# EAGLE board Binaari_shield (EAGLE 7.7.0)
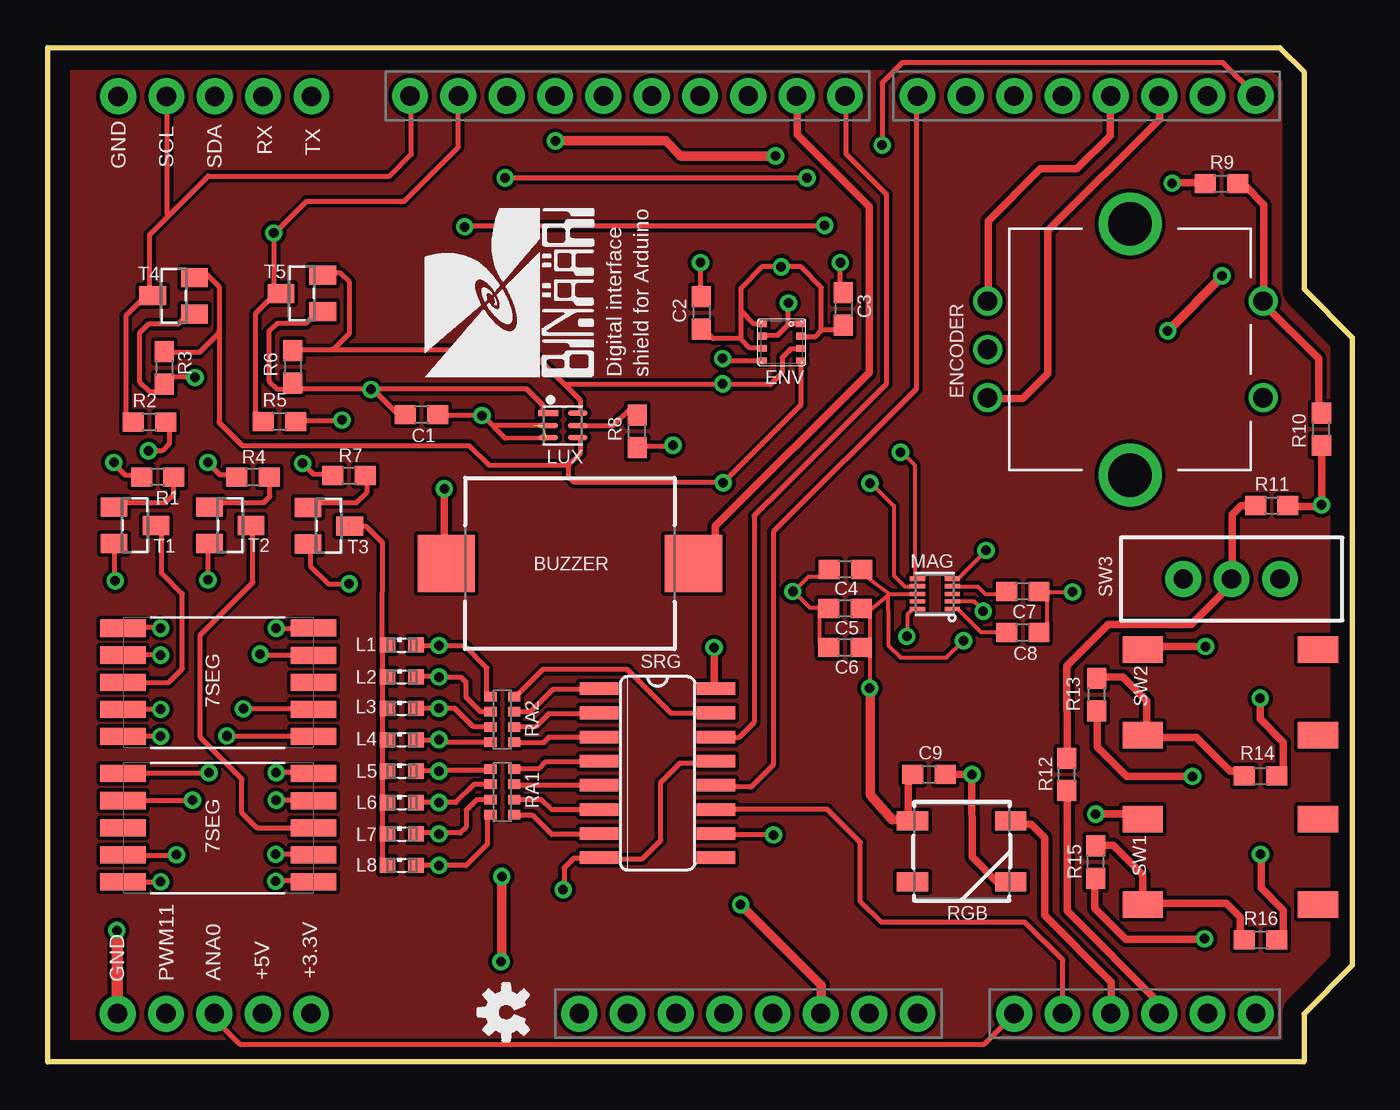
[diagram p0: board, top side]
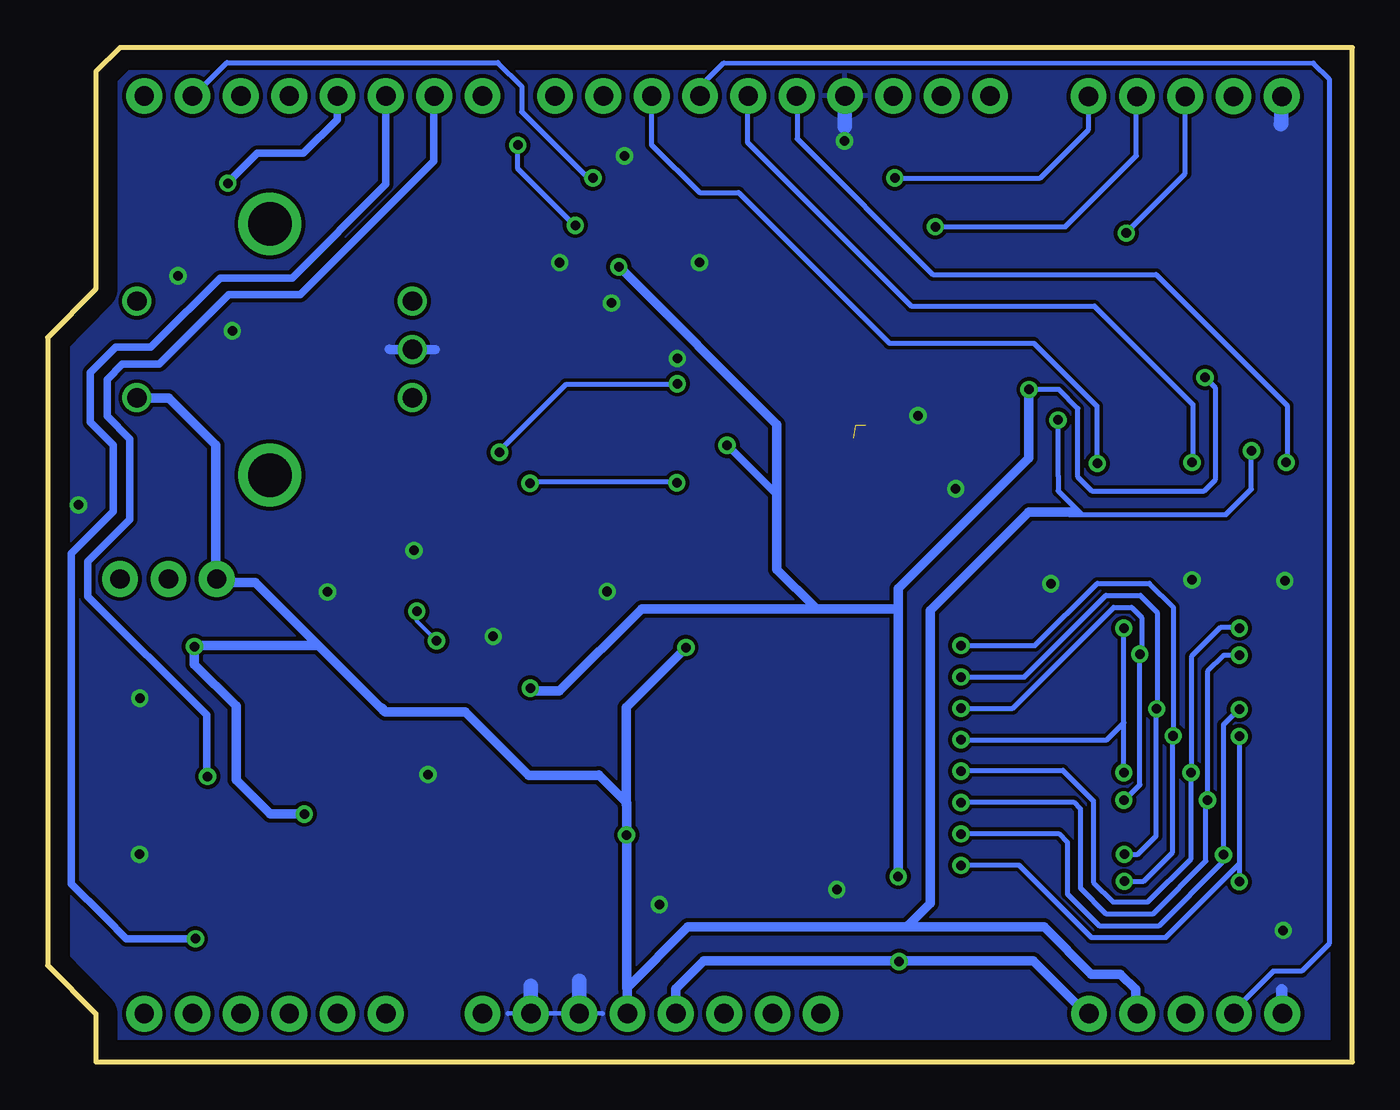
[diagram p1: board, bottom side, seen from below]

Size 68.58 x 53.34 mm. Coordinates in mm from the lower left corner, seen from the top.
Outline: 0,0 0,53.34 64.77,53.34 66.04,52.07 66.04,40.64 68.58,38.1 68.58,5.08 66.04,2.54 66.04,0 0,0
Copper layers (1*16): Top 0.035mm / dielectric 1.5mm / Bottom 0.035mm
Design rules "default *": minimum track width 10mil, minimum drill 24mil, track to track 8mil, track to pad 6mil, pad to pad 8mil, via to via 8mil, smd to smd 8mil, copper to edge 40mil, drill to drill 8mil, minimum pad ring 10mil, minimum via ring 8mil, stop-mask expansion 4mil, vias tented up to drill 0mil, thermal gap 10mil

## Footprints (pad centres in the part's own frame; a part is rotated, then mirrored left to right if it is on the bottom)
0603 = smd 1.1 x 1: 1 -0.85,0; 2 0.85,0
UNO_R3_SHIELD = drill 1.016 pad 1.88: 3.3V 35.56,2.54; 5V 38.1,2.54; A0 50.8,2.54; A1 53.34,2.54; A2 55.88,2.54; A3 58.42,2.54; A4 60.96,2.54; A5 63.5,2.54; AREF 24.13,50.8; D2 58.42,50.8; D3 55.88,50.8; D4 53.34,50.8; D5 50.8,50.8; D6 48.26,50.8; D7 45.72,50.8; D8 41.91,50.8; D9 39.37,50.8; D10 36.83,50.8; D11 34.29,50.8; D12 31.75,50.8; D13 29.21,50.8; GND@0 40.64,2.54; GND@1 43.18,2.54; GND@2 26.67,50.8; IOREF 30.48,2.54; NC 27.94,2.54; RES 33.02,2.54; RX 63.5,50.8; SCL 19.05,50.8; SDA 21.59,50.8; TX 60.96,50.8; VIN 45.72,2.54
SEG = smd 0.9 x 2.4: P$1 0.6,10.01; P$2 2.02,10.01; P$3 3.45,10.01; P$4 4.88,10.01; P$5 6.3,10.01; P$6 0.6,0; P$7 2.03,0; P$8 3.45,0; P$9 4.87,0; P$10 6.31,0
BUZZER-CMT1102 = smd 3 x 3: 1 -6.5,0; 2 6.5,0
ROTARY_ENC_PLAIN = drill 1.016: A 7.493,-2.54; B 7.493,2.54; C 7.493,0; SW+ -6.985,2.54; SW- -6.985,-2.54 | drill 2.286: P$3 0,6.604; P$4 0,-6.604
BME280 = smd 0.35 x 0.5: 1 0.975,-1.025; 2 0.325,-1.025; 3 -0.325,-1.025; 4 -0.975,-1.025; 5 -0.975,1.025; 6 -0.325,1.025; 7 0.325,1.025; 8 0.975,1.025
SML0603 = smd 0.8 x 0.8: A 0.75,0; C -0.75,0
FN-6 = smd 1.05 x 0.3: 1 -0.775,0.65; 2 -0.775,0; 3 -0.775,-0.65; 4 0.775,-0.65; 5 0.775,0; 6 0.775,0.65
DFN-10 = smd 0.8 x 0.22: 1 -0.91,0.8; 2 -0.91,0.4; 3 -0.91,0; 4 -0.91,-0.4; 5 -0.91,-0.8; 6 0.91,-0.8; 7 0.91,-0.4; 8 0.91,0; 9 0.91,0.4; 10 0.91,0.8
0603-ARV = smd 0.5 x 0.65: 1 -1.2,-0.625; 2 -0.4,-0.625; 3 0.4,-0.625; 4 1.2,-0.625; 5 1.2,0.625; 6 0.4,0.625; 7 -0.4,0.625; 8 -1.2,0.625
WS2812B = smd 1.651 x 1: 1 -2.577,1.6; 2 -2.577,-1.6; 3 2.577,-1.6; 4 2.577,1.6
SO16 = smd 0.66 x 2.032: 1 -4.445,-3.073; 2 -3.175,-3.073; 3 -1.905,-3.073; 4 -0.635,-3.073; 5 0.635,-3.073; 6 1.905,-3.073; 7 3.175,-3.073; 8 4.445,-3.073; 9 4.445,3.073; 10 3.175,3.073; 11 1.905,3.073; 12 0.635,3.073; 13 -0.635,3.073; 14 -1.905,3.073; 15 -3.175,3.073; 16 -4.445,3.073
SW = smd 1.397 x 2.108: P$1 5.2,10.25; P$2 0.7,10.25; P$3 0.7,1.05; P$4 5.2,1.05
SWITCH-SPDT = drill 1.016 pad 1.88: 1 0,2.54; 2 0,0; 3 0,-2.54
SOT23 = smd 1 x 1.4: 1 -0.95,-1.1; 2 0.95,-1.1; 3 0,1.1
1X05 = drill 1.016 pad 1.88: 1 0,0; 2 2.54,0; 3 5.08,0; 4 7.62,0; 5 10.16,0

## Placement (x,y rotation side)
C1  [0603]  19.66,34.04 180 top
C2  [0603]  34.37,39.4 270 top
C3  [0603]  41.83,39.6 270 top
C4  [0603]  41.94,25.91 180 top
C5  [0603]  41.91,23.85 180 top
C6  [0603]  41.91,21.79 180 top
C7  [0603]  51.26,24.74 180 top
C8  [0603]  51.26,22.58 180 top
C9  [0603]  46.33,15.11 180 top
E$1  [UNO_R3_SHIELD]  0,0 0 top
E$2  [SEG]  13.97,16.51 90 top
E$3  [SEG]  13.97,8.86 90 top
E$4  [OSHW-LOGO-S]  24.1,2.62 90 top
E$6  [BUZZER-CMT1102]  27.45,26.21 0 top
E$8  [LOGO2]  29.68,35.07 90 top
ENCODER  [ROTARY_ENC_PLAIN]  56.9,37.47 180 top
ENV  [BME280]  38.58,37.85 90 top
L1  [SML0603]  18.62,21.92 0 top
L2  [SML0603]  18.62,20.24 0 top
L3  [SML0603]  18.62,18.59 0 top
L4  [SML0603]  18.62,16.94 0 top
L5  [SML0603]  18.62,15.29 0 top
L6  [SML0603]  18.62,13.64 0 top
L7  [SML0603]  18.62,11.99 0 top
L8  [SML0603]  18.62,10.34 0 top
LUX  [FN-6]  27.09,33.47 0 top
MAG  [DFN-10]  46.63,24.61 180 top
R1  [0603]  5.79,30.76 180 top
R2  [0603]  5.36,33.66 0 top
R3  [0603]  6.12,36.5 270 top
R4  [0603]  10.79,30.76 0 top
R5  [0603]  12.19,33.68 0 top
R6  [0603]  12.88,36.55 270 top
R7  [0603]  15.85,30.84 0 top
R8  [0603]  30.99,33.16 90 top
R9  [0603]  61.7,46.18 0 top
R10  [0603]  66.95,33.27 90 top
R11  [0603]  64.34,29.26 0 top
R12  [0603]  53.57,15.12 90 top
R13  [0603]  55.15,19.32 90 top
R14  [0603]  63.75,15.04 0 top
R15  [0603]  55.1,10.52 90 top
R16  [0603]  63.75,6.43 0 top
RA1  [0603-ARV]  23.9,14.2 90 top
RA2  [0603-ARV]  23.9,18.01 90 top
RGB  [WS2812B]  48.04,11.08 0 top
SRG  [SO16]  32.06,15.18 270 top
SW1  SW1  [SW]  67.82,7.57 90 top
SW2  SW2  [SW]  67.82,16.48 90 top
SW3  [SWITCH-SPDT]  62.23,25.4 90 top
T1  [SOT23]  4.6,28.22 270 top
T2  [SOT23]  9.6,28.22 270 top
T3  [SOT23]  14.78,28.19 270 top
T4  [SOT23]  6.63,40.28 90 top
T5  [SOT23]  13.36,40.41 90 top
USER_CONN1  [1X05]  3.68,2.54 0 top
USER_CONN2  [1X05]  13.87,50.77 180 top

## Library data of the parts
C1-C9 R8-R12 RA1 RA2 = SparkFun-Capacitors
E$1 = SparkFun-Boards
E$2 E$3 E$8 SW1 SW2 = segment_tuukka
E$4 = SparkFun-Aesthetics
E$6 ENCODER SW3 = SparkFun-Electromechanical
ENV = bosch-bme280
L1-L8 = led
LUX MAG = SparkFun-Sensors
R1-R7 R13-R16 = SparkFun-Resistors
RGB = SparkFun-LED
SRG = 74xx-us
T1-T5 = sot23_tuukka
USER_CONN1 USER_CONN2 = SparkFun-Connectors

## Nets
GND: E$1.GND@2
S$80: E$1.A3

## Tracks (layer width: path | path; a pad name or v marks a point on that pad's centre or on a via)
GND  (via drill 0.5)
  Top 0.203: 47.85,25.43 v49.33,26.9
  Top 0.254: 38.94,38.81 v38.94,39.9
  Bottom 0.254: 39.42,2.54 44.37,2.55
  Bottom 0.508: 48.21,37.47 50.6,37.47 50.62,37.49
  Bottom 0.61: 3.72,2.62 3.72,3.79
  Bottom 0.762: 40.64,2.59 40.64,4.27 | 43.18,2.52 43.18,4.01 | 3.73,50.77 3.73,49.33 3.76,49.3 | E$1.GND@2 26.67,49.2 26.7,49.17
  other vias: 27.1,9.07 3.56,25.3 8.43,25.35 15.85,25.15 48.59,15.12 63.75,10.92 63.73,19.13 66.95,29.29 53.87,24.71 45.16,22.38 39.17,24.74 41.66,42.03 34.32,42.04 35.48,36.99 36.43,8.27 22.83,33.99 58.87,38.45 61.73,41.34 20.85,30.14 26.69,48.43 38.26,47.64 3.64,6.92
  pour Bottom: 1.09,52.6 64.41,52.6 65.25,51.77 65.25,40.23 67.79,37.69 67.79,5.54 65.2,2.95 65.2,0.71 1.09,0.71
S$1  (via drill 0.5)
  Top 0.254: 12.88,15.21 v12.01,15.21
S$2  (via drill 0.5)
  other vias: 12.01,13.77
S$3
  Bottom 0.254: 20.55,18.59 17.86,18.59 12.55,23.9 11.61,23.9 11.07,23.37 11.07,21.46
S$4
  Bottom 0.254: 10.31,18.52 10.31,11.89 11.28,10.92 11.96,10.92
S$5  (via drill 0.5)
  Bottom 0.254: 9.45,17.12 9.45,11.02 10.97,9.5 v11.99,9.5
S$6
  Top 0.254: 12.9,13.77 12.04,13.77
S$7  (via drill 0.5)
  other vias: 5.94,18.54
S$8
  Top 0.254: 12.95,9.53 12.01,9.53
S$9
  Bottom 0.254: 20.55,20.24 17.25,20.24 12.95,24.54 11.15,24.54 10.26,23.65 10.26,18.57
S$10
  Bottom 0.254: 11.18,21.39 11.18,14.58 11.96,13.79
S$11  (via drill 0.5)
  other vias: 20.57,10.34
S$12
  Bottom 0.254: 5.94,18.57 6.78,17.73 6.78,10.92
S$13  (via drill 0.5)
  other vias: 11.18,21.44
S$14  (via drill 0.5)
  other vias: 6.78,10.9
S$15  (via drill 0.5)
  other vias: 10.29,18.57
S$16
  Top 0.406: 58.42,16.94 58.45,16.97
S$17
  Top 0.254: 12.04,22.8 13.28,22.8
S$18
  Top 0.254: 11.2,21.41 13.06,21.41 13.06,21.39
S$19
  Top 0.254: 13.18,19.96 13.18,19.86
S$20
  Top 0.254: 10.31,18.59 13.23,18.59
S$21
  Top 0.254: 9.47,17.14 13.46,17.14 13.46,17.12
S$22  (via drill 0.5)
  other vias: 5.94,22.81
S$23  (via drill 0.5)
  Top 0.254: 12.98,10.92 v11.99,10.92
S$24
  Bottom 0.254: 8.46,15.21 8.46,21.31 6.93,22.84 5.94,22.84
S$25  (via drill 0.5)
  Bottom 0.254: 7.62,13.74 v7.62,13.77 7.62,20.52 6.76,21.39 v5.94,21.39
S$26  (via drill 0.5)
  other vias: 8.48,15.21
S$27  (via drill 0.5)
  other vias: 20.57,11.99
S$28  (via drill 0.5)
  other vias: 20.57,13.64
S$29  (via drill 0.5)
  other vias: 20.57,15.29
S$30  (via drill 0.5)
  Bottom 0.254: 12.01,15.24 12.01,17.83 | 12.01,17.83 v12.01,22.81 | v20.57,16.94 12.9,16.94 12.01,17.83
S$31  (via drill 0.5)
  other vias: 20.57,18.59
S$32  (via drill 0.5)
  other vias: 20.57,20.24
S$33  (via drill 0.5)
  Bottom 0.254: v20.57,21.89 16.69,21.89 13.41,25.17 10.67,25.17 9.42,23.93 v9.42,17.14
S$34
  Top 0.254: 23.09,19.3 23.09,20.73 21.95,21.87 20.65,21.87 20.62,21.89
S$35
  Top 0.254: 23.11,18.41 22.76,18.41 22,19.18 22,19.96 21.74,20.22 20.62,20.22 20.6,20.24
S$36
  Top 0.254: 23.04,17.63 22.38,17.63 21.41,18.59 20.62,18.59
S$37
  Top 0.254: 23.22,16.82 20.78,16.82 20.68,16.92
S$38
  Top 0.254: 23.14,15.34 20.6,15.34
S$39
  Top 0.254: 23.11,13.01 23.11,11.46 22,10.34 20.6,10.34
S$40
  Top 0.254: 23.14,13.79 22.55,13.79 22,13.23 22,12.34 21.69,12.04 20.6,12.04
S$41
  Top 0.254: 23.09,14.61 22.43,14.61 21.46,13.64 20.6,13.64
S$42
  Top 0.254: 20.6,21.87 19.43,21.87
S$43
  Top 0.254: 20.55,20.27 19.36,20.27
S$44
  Top 0.254: 20.55,18.59 19.46,18.59 19.41,18.64
S$45
  Top 0.254: 20.57,16.92 19.51,16.92 19.48,16.89
S$46
  Top 0.254: 20.57,15.32 19.46,15.32 19.41,15.27
S$47
  Top 0.254: 20.55,13.64 19.48,13.64 19.43,13.59
S$48
  Top 0.254: 20.55,12.04 19.46,12.04 19.43,12.06
S$49
  Top 0.254: 20.55,10.34 19.46,10.34 19.43,10.36
S$50
  Top 0.254: 17.6,21.92 17.59,10.24
S$51
  Top 0.254: 5.94,9.45 4.88,9.45 4.8,9.53
S$52
  Top 0.254: 6.78,10.85 4.5,10.85 4.45,10.79
S$53
  Top 0.254: 7.62,13.72 4.29,13.72 4.27,13.74
S$54
  Top 0.254: 8.48,15.16 4.78,15.16 4.72,15.11
S$55
  Top 0.254: 5.94,22.84 4.45,22.84 4.42,22.86
S$56
  Top 0.254: 5.94,21.41 4.67,21.41
S$57
  Top 0.254: 5.92,18.54 4.88,18.54 4.78,18.64
S$58
  Bottom 0.254: 20.57,15.34 15.21,15.34 13.61,13.74 13.61,9.45 12.57,8.41 10.77,8.41 8.48,10.69 8.48,15.14 8.53,15.19
S$59
  Bottom 0.254: 20.57,13.66 14.66,13.66 14.3,13.31 14.3,9.14 12.95,7.8 10.46,7.8 7.7,10.57 7.7,13.66 7.57,13.79
S$60
  Bottom 0.254: 20.57,12.01 15.44,12.01 14.99,11.56 14.99,8.84 13.31,7.16 10.16,7.16 6.88,10.44 6.88,10.69 6.78,10.79
S$61  (via drill 0.5)
  Top 0.254: v5.94,17.12 4.83,17.12 4.8,17.14
  Bottom 0.254: 20.57,10.36 17.53,10.36 13.72,6.55 9.8,6.55 5.94,10.41 | v5.94,17.12 5.94,10.41 | 5.94,10.41 v5.94,9.47 5.94,9.45
S$62
  Top 0.254: 28.19,11.96 26.49,11.96 25.5,12.95 24.61,12.95 24.54,12.88
S$63
  Top 0.254: 28.27,13.26 26.49,13.26 25.96,13.79 24.77,13.79 24.71,13.74
S$64
  Top 0.254: 28.19,14.55 24.59,14.55 24.54,14.61
S$65
  Top 0.254: 28.19,15.77 26.16,15.77 25.81,15.42 24.56,15.42 24.54,15.39
S$66
  Top 0.254: 28.17,17.07 26.34,17.07 26.06,16.79 24.66,16.79 24.59,16.71
S$67
  Top 0.254: 28.25,18.31 26.34,18.31 25.65,17.63 24.61,17.63
S$68
  Top 0.254: 28.25,19.58 26.54,19.58 25.38,18.41 24.56,18.41 24.54,18.39
S$69
  Top 0.254: 34.34,18.34 32.77,18.34 30.45,20.65 26.04,20.65 24.64,19.25
S$70
  Top 0.254: 13.44,31.45 13.97,30.91 14.78,30.91
S$71
  Top 0.254: 13.95,29.41 16.23,29.41 16.79,29.97 16.79,30.91
S$72
  Top 0.406: 64.95,6.73 64.95,7.98 63.78,9.14 63.78,11
S$73
  Top 0.406: 64.95,15.09 64.95,16.82 63.73,18.03 63.73,19.13 63.75,19.15
S$74  (via drill 0.5)
  Bottom 0.406: 65.53,7.57 64.44,6.48 v60.81,6.48
S$75
  Top 0.406: 55.23,11.4 56.01,11.38 57.56,9.85
S$76  (via drill 0.5)
  Top 0.406: v60.17,15.01 56.71,15.02 55.17,16.58 55.18,18.05 55.15,18.15
S$77
  Top 0.406: 55.24,20.25 56.52,20.25 57.77,18.99 57.77,17.24 58.42,17.17
S$78  (via drill 0.5)
  other vias: 55.09,13.03
S$79
  Bottom 0.508: 55.09,13.05 56.88,13.05 58.67,14.84 58.67,15.96
S$80
  Top 0.406: E$1.A3 58.45,3.06 53.58,7.95 53.59,13.94
S$81
  Top 0.406: 62.26,25.17 60.1,23.01 55.75,23.01 53.58,20.82 53.59,16
S$82  (via drill 0.5)
  Bottom 0.508: 54.41,21.89 60.81,21.89 v60.86,21.84 60.86,20.9 58.67,18.72 58.67,15.9
S$83
  Top 0.254: 6.4,33.4 6.4,32.51 6.02,32.13 5.33,32.13 5.31,32.16
S$84
  Top 0.406: 65.56,29.18 65.58,29.21 66.98,29.21
S$85
  Top 0.406: 62.26,25.32 62.26,28.78 62.74,29.26 63.14,29.26 63.2,29.31
S$86
  Top 0.406: 60.85,21.85 57.73,21.85 57.73,21.87
S$87
  Top 0.406: 55.85,50.72 55.85,48.72 54.1,46.97 52.17,46.97 49.43,44.22 49.43,40.01 49.45,39.98
S$88
  Top 0.406: 58.45,50.67 58.45,49.58 52.58,43.71 52.58,36.2 51.26,34.87 49.61,34.87
S$89
  Top 0.254: 15.85,38.3 14.99,37.44 13.21,37.44
S$90
  Top 0.254: 7.19,39.12 6.86,38.79 5.28,38.79 4.83,38.33 4.83,35.79 5.36,35.26 5.87,35.26
S$91
  Bottom 0.254: 6.66,28.78 5.31,30.12 5.31,32.16
S$92
  Top 0.203: 45.44,23.77 45.19,23.52 45.19,22.43
S$93  (via drill 0.5)
  other vias: 49.17,23.7
S$94
  Top 0.203: 47.85,23.8 49.05,22.61 50.19,22.61
S$95
  Top 0.203: 47.9,24.99 48.9,24.99 49.28,24.61 50.06,24.61
S$96  (via drill 0.5)
  other vias: 32.87,32.42
S$97
  Top 0.203: 52.45,22.84 52.53,22.91
S$98
  Top 0.254: 8.43,31.5 9.04,30.89 9.78,30.89
S$99
  Top 0.203: 52.48,24.69 52.5,24.71 53.9,24.71
S$100
  Top 0.203: 45.47,24.59 44.27,24.59 43.13,25.43
S$101
  Top 0.203: 44.25,24.59 43.2,23.75 42.88,23.75
S$102
  Top 0.203: 40.62,25.5 39.98,25.5 39.24,24.77
S$103
  Top 0.203: 40.64,23.88 40.08,23.88 39.19,24.77
S$104
  Top 0.254: 3.45,31.5 4.09,30.86 4.85,30.86
S$105
  Top 0.254: 13.16,12.29 11.02,12.29 10.21,13.11 10.21,14.88 8.03,17.07 8.03,22.45 10.79,25.22 10.79,28.27 10.82,28.3
S$106
  Top 0.254: 4.83,19.96 6.38,19.96 7.09,20.68 7.09,24.61 5.99,25.7 5.99,28.09 6.07,28.17
S$107
  Top 0.254: 17.6,22.16 17.61,27.29 16.74,28.17 15.93,28.17
S$108
  Top 0.254: 3.99,29.41 6.2,29.41 6.63,29.84 6.63,30.56
S$109
  Top 0.254: 13.82,27.1 13.82,26.09 14.78,25.12 15.82,25.12 15.85,25.09
S$110
  Top 0.254: 8.91,29.41 11.35,29.41 11.68,29.74 11.68,30.56 11.66,30.58
S$111
  Top 0.254: 32.89,32.37 31.24,32.36
S$112
  Top 0.254: 3.53,25.3 3.53,27.25 3.58,27.3
S$113
  Top 0.254: 8.43,25.32 8.43,27.18
S$114
  Bottom 0.406: 64.62,36.7 62.71,36.7 59.05,40.36 55.3,40.36 48.28,47.37 48.28,50.77
S$115
  Top 0.406: 55.88,2.52 55.9,4.2 52.4,7.7 52.41,11.78 51.69,12.5 51.02,12.51 50.95,12.54
S$116
  Top 0.406: 49.97,9.39 48.59,10.78 48.58,15.09
S$117
  Top 0.406: 60.76,6.45 56.66,6.45 55.04,8.07 55.04,9.4
S$118
  Top 0.406: 47.54,15.11 48.54,15.11
S$119  (via drill 0.5)
  Top 0.254: 39.65,38.15 40.36,38.15 40.66,38.46 40.66,38.48 | 40.66,38.48 40.66,40.74 39.6,41.81 v38.56,41.81 37.54,41.81 36.47,40.74 | 41.68,38.48 40.66,38.48
S$120
  Top 0.254: 39.47,38.81 38.96,38.81 38.35,38.2 37.67,38.2 37.64,38.18
S$121
  Top 0.254: 37.41,37.54 36.91,37.54 36.45,38 36.45,39.5 | 36.45,39.5 36.45,40.13 36.45,40.64 36.45,40.72 | 37.47,38.81 37.13,38.81 36.45,39.5
S$122
  Bottom 0.406: 62.97,37.77 63.14,37.59 65,37.59 66.34,36.25 66.34,33.66 65.13,32.44 65.13,28.96 67.33,26.75 67.33,9.37 65.61,7.64
S$123
  Top 0.254: 36.42,38.02 34.98,38.02 34.59,38.41
S$124
  Bottom 0.254: 60.94,50.77 59.16,52.55 44.91,52.55 43.66,51.31 43.66,49.96 40.82,47.12 40.01,46.31
S$125
  Bottom 0.406: 62.94,37.8 59.51,41.22 55.73,41.22 50.8,46.15 50.8,50.75
S$126
  Top 0.254: 28.22,10.72 27.66,10.72 27.15,10.21 27.15,9.02
S$127
  Bottom 0.406: 64.64,36.7 65.46,35.89 65.46,33.96 64.26,32.77 64.26,28.52 66.47,26.31 66.47,24.49 60.22,18.24 60.22,14.96
S$128
  Top 0.254: 41.66,40.77 41.66,41.97
S$129
  Top 0.254: 34.34,40.56 34.34,42.04
S$130
  Top 0.254: 53.37,2.52 53.37,5.36 51.36,7.35 43.8,7.35 42.72,8.43 42.72,11.56 40.99,13.29 35.81,13.28 35.79,13.26
S$131
  Top 0.6: 3.66,2.54 3.66,6.81
S$132
  Bottom 0.254: 34.45,51.12 33.03,52.54 2.06,52.53 1.22,51.69 1.22,6.22 2.67,4.78 4.17,4.78 6.3,2.64
S$133
  Top 0.254: 50.8,2.56 50.8,2.52 49.2,0.91 10.13,0.91 8.69,2.36
S$134
  Bottom 0.508: 35.56,2.52 35.56,3.83 34.09,5.31 16.76,5.31 13.89,2.44
S$135  (via drill 0.5)
  Bottom 0.508: 38.15,3.89 v38.15,11.94 38.15,13.61 39.62,15.09
S$136
  Bottom 0.508: 39.65,15.06 43.28,15.06 46.63,18.41 50.83,18.41 51.03,18.62
S$137
  Top 0.254: 11.91,40.54 11.91,43.56 13.61,45.26 18.75,45.26 21.59,48.11 21.59,50.72 21.54,50.77
S$138
  Top 0.254: 5.36,40.49 5.36,43.51 8.43,46.58 17.98,46.58 19.13,47.73 19.13,50.75 19.15,50.77
S$139
  Top 0.254: 8.41,41.38 9.04,40.74 9.04,38.38 7.98,37.31 6.4,37.31
S$140
  Top 0.254: 15.88,38.3 15.88,41 15.39,41.48 14.73,41.48
S$141
  Top 0.254: 13.92,39.19 13.56,38.84 12.06,38.84 11.63,38.41 11.63,35.81 12.06,35.38 12.7,35.38
S$142
  Top 0.254: 6.27,35.23 6.29,35.25
S$143
  Bottom 0.508: 23.34,7.1 23.34,7.18 22.18,8.34 22.18,23.75 17.05,28.89
S$144
  Top 0.254: 5.11,40.23 4.12,39.24 4.12,33.6
S$145
  Top 0.254: 11.84,40.26 10.92,39.34 10.92,33.73
S$146
  Top 0.254: 14.94,37.47 25.32,37.47 27.99,34.8 28,34.09
S$147
  Top 0.254: 9.02,38.46 9.02,33.63 10.24,32.41 22.17,32.41 23.21,31.39 27.36,31.38 28.01,32.03 28.01,32.8
S$148
  Top 0.254: 26.06,34.1 26.06,34.52 25.2,35.38
S$149
  Top 0.406: 39.39,50.79 39.39,48.76 43.18,44.97 43.18,36.25 35.1,28.17 35.1,27.34
S$150  (2 unrouted)
  Top 0.254: 26.21,32.79 24.03,32.79 | 26.12,33.47 23.94,33.47 | 25.59,33.47 23.41,33.47
S$151  (via drill 0.5)
  Top 0.254: 63.5,50.83 61.77,52.55 44.93,52.55 43.87,51.49 v43.87,48.21
  Bottom 0.254: 40.87,43.97 43.87,46.97 v43.87,48.21
S$152
  Top 0.254: 20.88,34.01 22.84,34.01 24.04,32.8
S$153
  Top 0.254: 39.52,37.49 39.06,37.49 38.61,37.03 38.61,36.25 37.97,35.61 27.2,35.61 27.18,35.64
S$154  (via drill 0.5)
  other vias: 3.48,31.52
S$155  (via drill 0.5)
  other vias: 8.43,31.52
S$156  (via drill 0.5)
  other vias: 13.41,31.47
S$157
  Top 0.254: 13.39,29.26 13.34,29.21
S$158
  Top 0.254: 8.46,29.44 8.31,29.29
S$159
  Bottom 0.254: 29.18,50.8 29.18,48.54 22.05,41.4 10.31,41.4 3.43,34.52 3.43,31.55 3.48,31.5
S$160
  Bottom 0.254: 31.8,50.77 31.8,48.36 23.19,39.75 13.56,39.75 8.38,34.57 8.38,31.47
S$161
  Bottom 0.254: 36.84,50.83 36.84,48.23 34.31,45.72 32.26,45.72 24.33,37.8 16.74,37.8 13.44,34.49 13.44,31.52
S$162
  Top 0.406: 60.5,46.28 60.6,46.18
S$163
  Top 0.406: 62.94,46.08 63.93,45.09 63.93,39.95
S$164
  Top 0.406: 63.93,39.85 66.81,36.98 66.8,34.37
S$165
  Top 0.406: 66.95,31.98 66.95,29.31
S$166
  Top 0.254: 41.96,50.83 41.96,47.75 44.07,45.64 44.07,35.64 37.9,29.46
S$167
  Top 0.254: 37.92,29.52 37.13,28.73 37.13,17.86 36.32,17.04 35.89,17.04
S$168
  Top 0.254: 45.64,50.9 45.64,35.38 38.15,27.89 38.15,15.62 36.98,14.45 35.92,14.45 35.84,14.53
S$169
  Top 0.254: 28.09,33.46 29.71,33.46 30.61,34.36
S$170
  Top 0.406: 20.85,27.32 20.85,30.1
S$171
  Top 0.254: 37.5,36.86 35.54,36.86 35.49,36.91
S$172  (via drill 0.5)
  other vias: 39.92,46.48
S$173  (via drill 0.5)
  other vias: 40.84,43.99
S$174
  Top 0.254: 40.01,46.48 24.13,46.48
S$175
  Top 0.254: 40.87,43.94 21.92,43.94
S$176  (via drill 0.5)
  Bottom 0.254: v24.05,46.48 16.41,46.48 13.87,49.02 13.87,50.67
S$177  (via drill 0.5)
  other vias: 21.92,43.92
S$178
  Bottom 0.254: 21.89,43.92 15.09,43.92 11.35,47.65 11.35,50.67
S$179  (via drill 0.5)
  other vias: 11.89,43.59
S$180
  Bottom 0.254: 11.91,43.59 8.79,46.71 8.79,50.72
S$181
  Top 0.254: 6.3,44.58 6.3,50.65 6.38,50.65
S$182
  Bottom 0.508: 38.12,2.56 38.12,3.91 34.92,7.11 16.2,7.11 13.72,4.62 12.19,4.62 11.38,3.81 11.38,2.49 11.4,2.46
S$183
  Top 0.254: 27.36,31.39 27.36,30.8 27.65,30.5 35.53,30.5 39.6,34.57 39.6,36.78 39.57,36.8
S$184  (via drill 0.5)
  other vias: 5.31,32.13
S$185  (via drill 0.5)
  other vias: 16.99,35.36
S$186  (via drill 0.5)
  other vias: 59.11,46.2
S$187
  Top 0.254: 13.16,35.41 17.02,35.41
S$188  (via drill 0.5)
  other vias: 15.47,33.76
S$189
  Bottom 0.406: 53.37,50.75 53.37,49.55 55.14,47.78 57.56,47.78 59.13,46.2
S$190
  Bottom 0.254: 15.47,30.86 15.47,33.73
S$191
  Bottom 0.508: 50.93,18.49 57.66,25.22 59.79,25.22
S$192
  Bottom 0.406: 32.87,32.45 30.24,29.82 30.25,29.45
S$193
  Bottom 0.508: 38.56,41.83 30.25,33.53 30.25,25.91 28.22,23.88
S$194
  Bottom 0.508: 63.88,34.9 62.2,34.9 59.74,32.44 59.74,25.38
S$195
  Top 0.508: 45.56,12.74 44.4,12.72 43.23,14.05 43.23,19.63
S$196
  Top 0.254: 13.39,33.73 15.47,33.73
S$197  (via drill 0.5)
  Bottom 0.254: v7.75,35.99 7.21,35.46 7.21,30.61 7.82,30 13.66,30 14.43,30.76 14.43,34.37 15.42,35.36 16.94,35.36 16.99,35.41
S$198
  Bottom 0.254: 15.47,30.84 15.47,30.02 14.22,28.78 6.68,28.78
S$199
  Top 0.254: 17.04,35.43 18.49,33.98 18.59,33.98
S$200
  Top 0.254: 25.17,35.38 16.97,35.38
S$201
  Top 0.254: 7.77,36.02 6.22,36.02 6.22,36.04
S$202  (via drill 0.5)
  other vias: 35.03,21.79
S$203  (via drill 0.5)
  other vias: 23.83,5.28
S$204
  Top 0.508: 23.88,5.28 23.88,9.68 23.9,9.7
S$205  (via drill 0.5)
  other vias: 23.88,9.75
S$206
  Bottom 0.406: 43.23,19.51 43.31,19.58
  Bottom 0.508: 23.88,9.73 23.88,23.82 | 23.88,23.82 23.88,24.89 17.02,31.75 17.02,35.36 | 23.88,23.82 37.36,23.82 41.68,19.51 43.23,19.51
S$207
  Bottom 0.508: 38.18,13.51 38.18,18.64 35.08,21.74
S$208
  Top 0.406: 35.03,21.82 35.03,19.63 35,19.61
S$209  (via drill 0.5)
  other vias: 35.48,35.66
S$210  (via drill 0.5)
  other vias: 35.51,30.45
S$211  (via drill 0.5)
  other vias: 44.83,32.05
S$212  (via drill 0.5)
  other vias: 43.23,30.43
S$213
  Bottom 0.254: 35.53,30.5 43.26,30.5 43.28,30.53
S$214
  Bottom 0.254: 35.43,35.61 41.35,35.61 44.83,32.13
S$215
  Top 0.203: 43.26,30.45 44.48,29.23 44.48,25.58 45.06,24.99 45.57,24.99
S$216
  Top 0.203: 44.88,32.08 45.57,31.39 45.57,25.43
S$217
  Top 0.254: 29.84,10.69 31.27,10.69 32.23,11.66 32.23,14.71 33.25,15.72 34.9,15.72
S$218
  Top 0.254: 35.79,11.96 38.23,11.96 38.25,11.94
S$219
  Top 0.203: 43.2,23.62 43.2,22.02
S$220
  Top 0.203: 40.56,23.77 40.56,22.02 40.66,21.92
S$221
  Top 0.203: 52.53,24.54 52.53,22.73 52.5,22.71
S$222
  Top 0.203: 43.2,21.46 43.2,19.74
S$223  (via drill 0.5)
  other vias: 43.21,19.66
S$224
  Top 0.406: 59.11,46.23 60.71,46.23
S$225
  Top 0.203: 44.2,23.7 44.2,24.61
S$226
  Top 0.406: 57.57,9.84 57.57,8.54 57.55,8.52
S$227  (via drill 0.5)
  Top 0.203: 44.2,23.67 44.2,21.89 44.83,21.26 47.24,21.26 v48.13,22.15
  Bottom 0.203: v48.13,22.15 49.17,23.19 49.17,23.72
S$228
  Top 0.203: 49.2,23.7 48.69,24.21 47.57,24.21
S$229
  Top 0.406: 58.13,17.06 60.38,17.07 62.13,15.32 62.84,15.32 62.89,15.27
S$230
  Top 0.406: 58.03,8.33 61.95,8.33 62.69,7.59 62.69,6.53 62.74,6.48
S$231
  Bottom 0.508: 17.02,28.91 14.55,28.91
S$232
  Bottom 0.254: 14.88,28.78 14.03,28.78
S$233
  Top 0.508: 40.66,2.59 40.66,4.03 36.42,8.27
S$234
  Top 0.406: 45.24,15.16 45.24,12.93
S$235
  Top 0.508: 58.89,38.46 61.75,41.33
S$236
  Top 0.406: 55.08,13.05 56.96,13.05 56.97,13.06
S$237
  Top 0.254: 3.61,2.52 3.63,2.49
S$239
  Top 0.5: 26.68,48.43 32.5,48.43 33.29,47.64 38.27,47.64
UPPER
  pour Top: 1.09,52.6 64.41,52.6 65.25,51.77 65.25,40.23 67.79,37.69 67.79,5.54 65.2,2.95 65.2,0.71 1.09,0.71

## Text on the board
tPlace: RX | TX | GND | SCL | SDA | Digital interface | shield for Arduino | BUZZER | GND | PWM11 | ANA0 | +5V | +3.3V
Document: Designer: Tuukka Panula